# Altium PCB ReversePolarityPCB.PcbDoc
Units mil, origin at the board's own origin, x right, y up, seen from the top; angles counter-clockwise.
Board outline 3630 x 2625 mil, 2 copper layers (Top Layer, Bottom Layer); 20 components, 12 nets, 71 pads, 0 vias.
Unrouted connection lines stored in the file: 1.
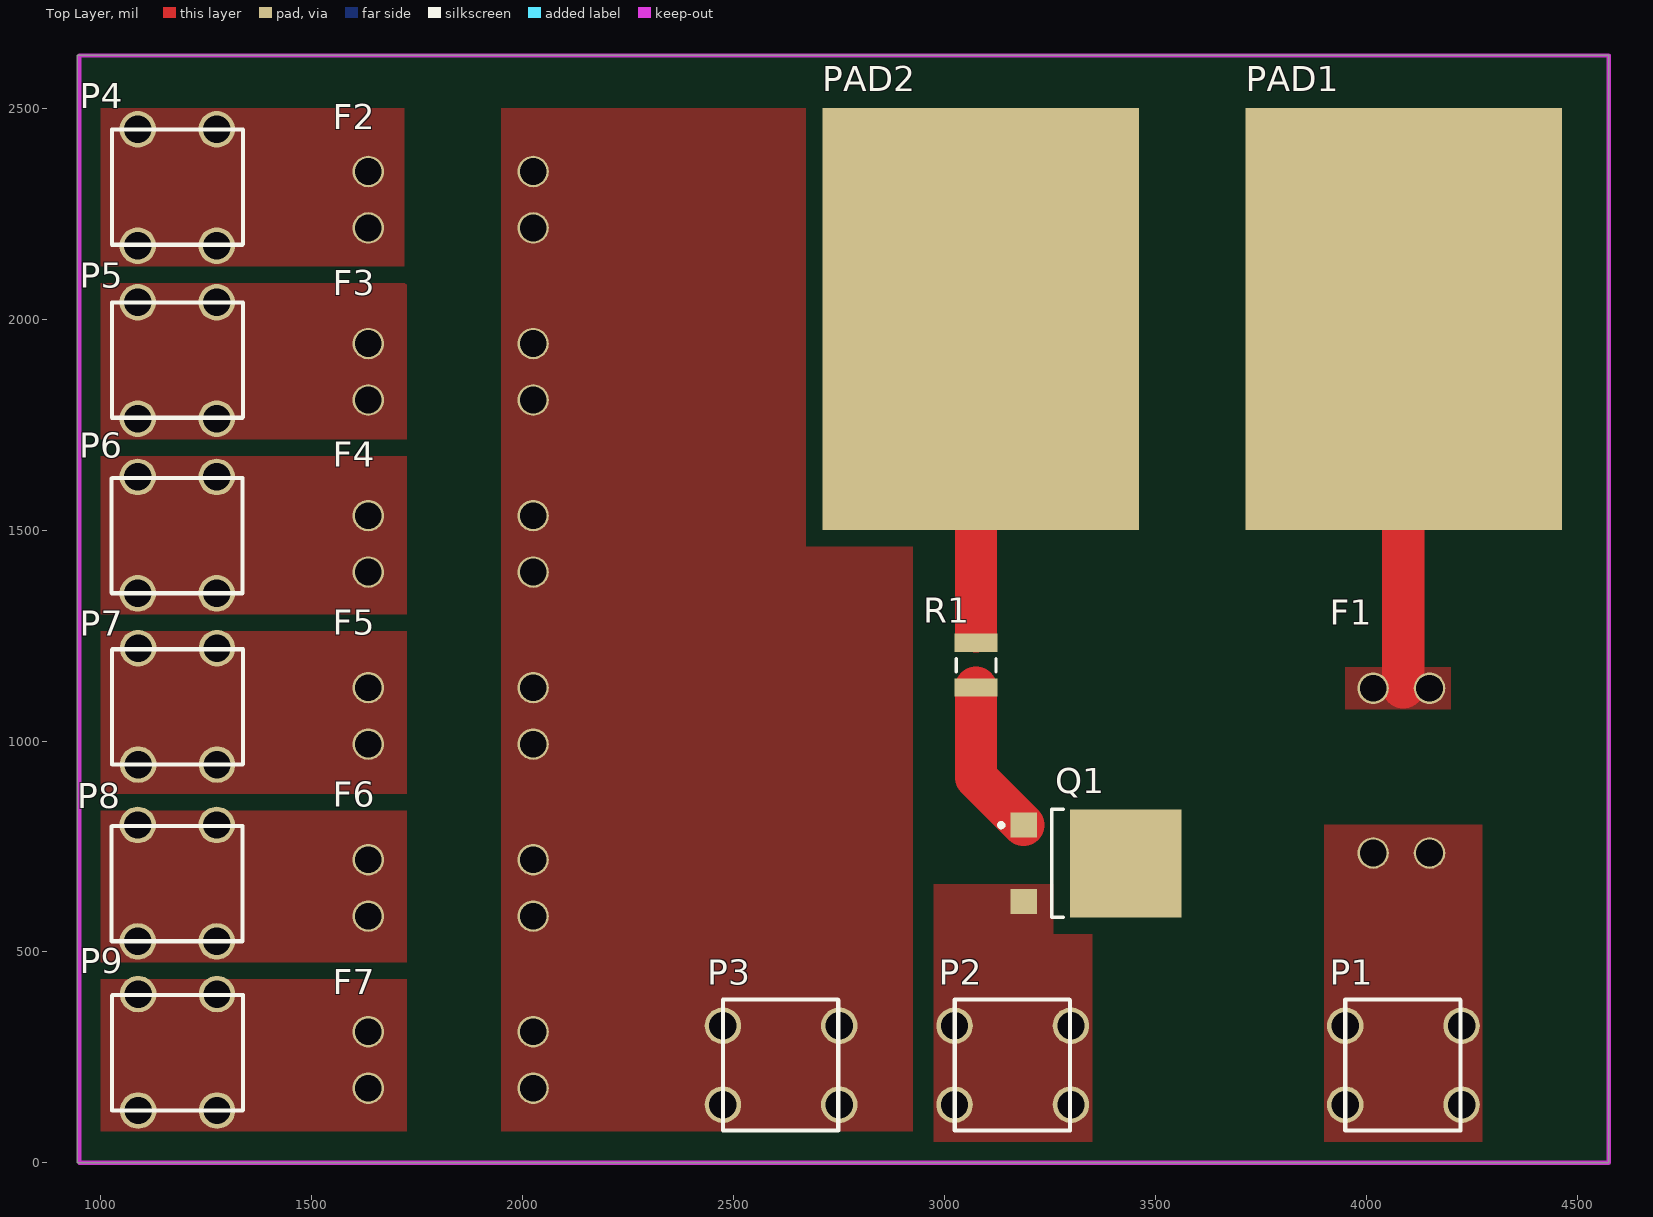
[diagram p0: Top Layer view]
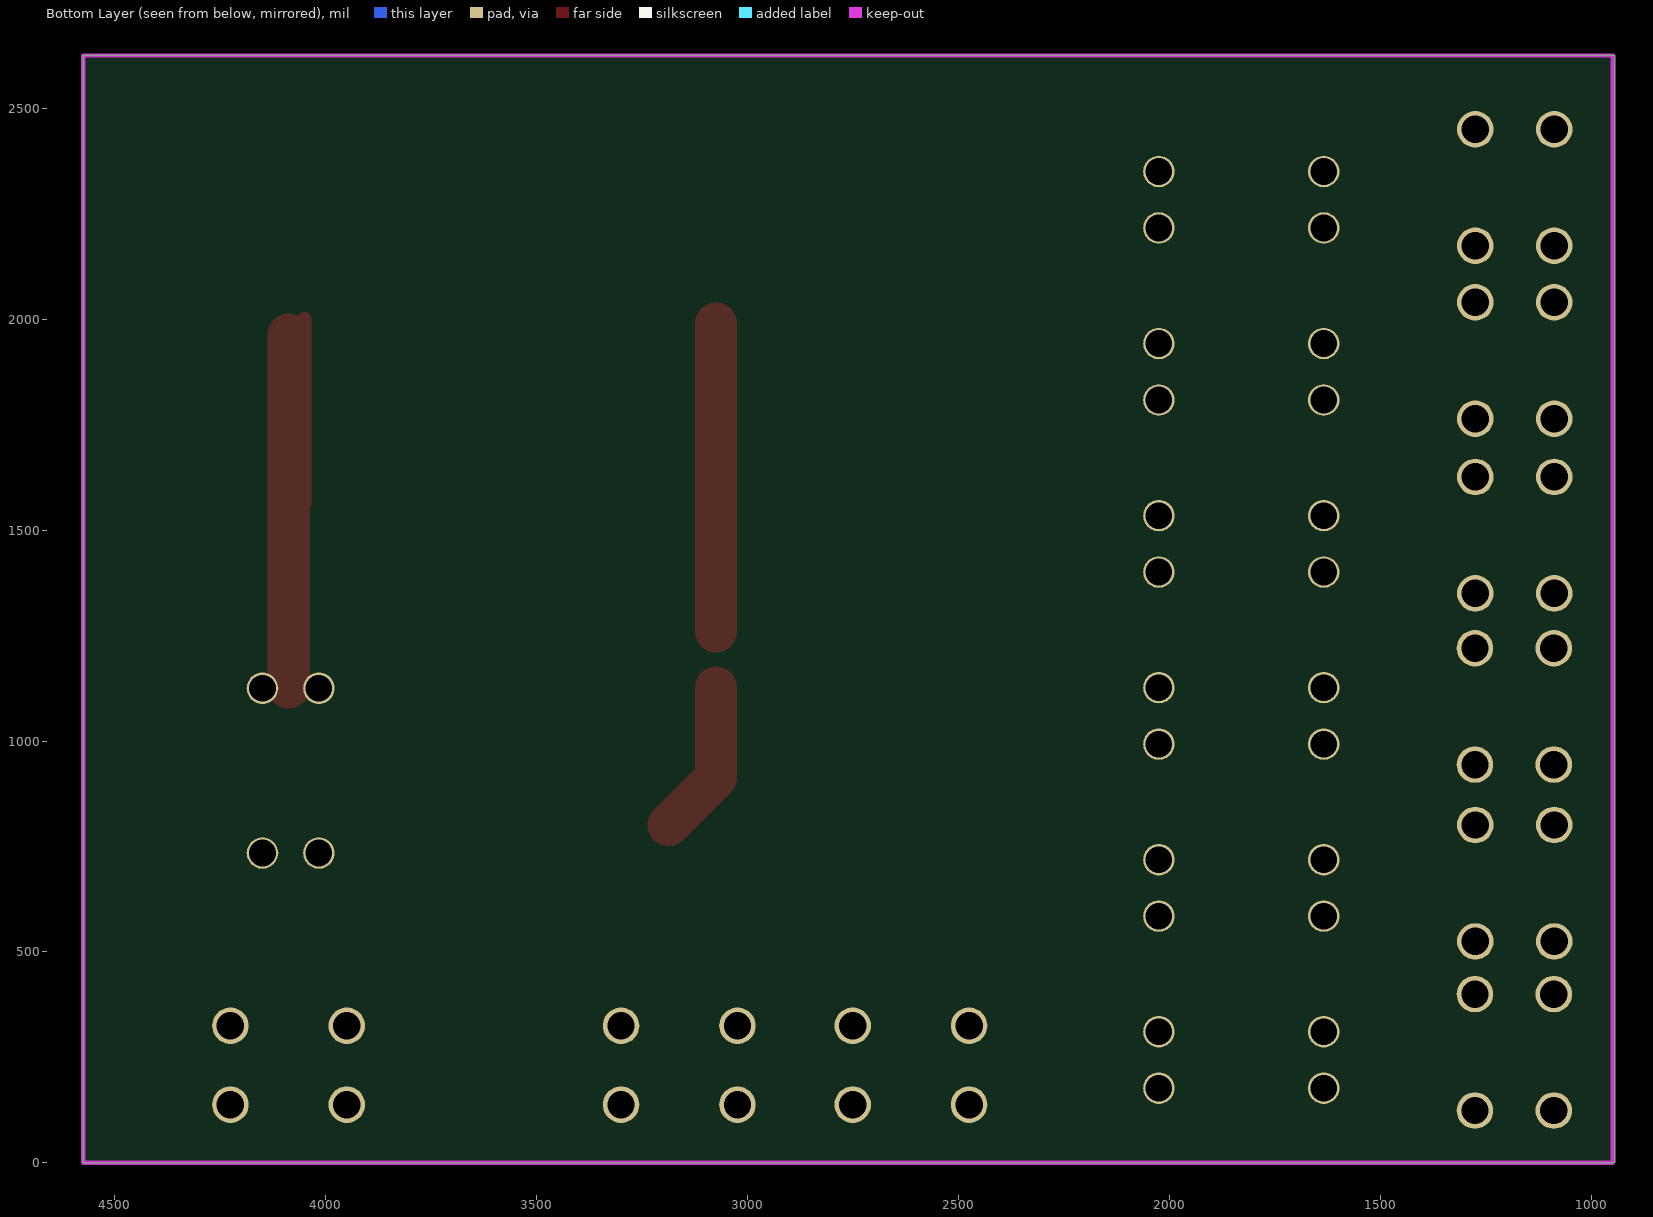
[diagram p1: Bottom Layer view, seen from below]
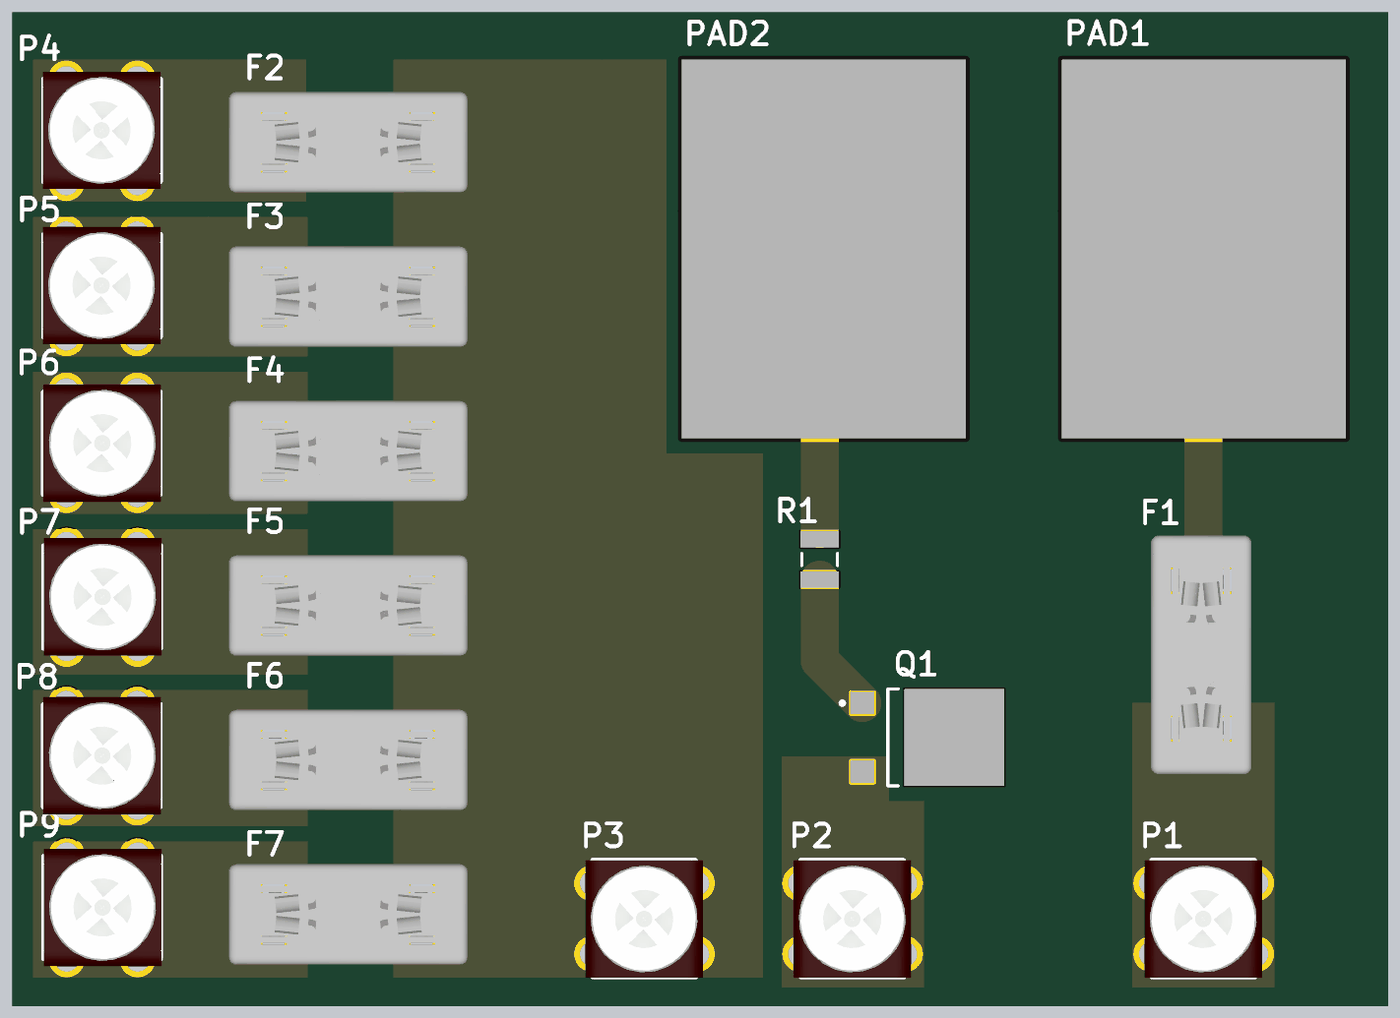
[diagram p2: 3D render of the assembled board from above, using the file's embedded part models]

## Layer stack, top to bottom
Top Solder: solder mask 0.4, Solder Resist, Dk 3.5
Top Layer: signal copper 1.4
Dielectric 1: dielectric 12.6, FR-4, Dk 4.8
Bottom Layer: signal copper 1.4
Bottom Solder: solder mask 0.4, Solder Resist, Dk 3.5

## Board outline
945,0 4575,0 4575,2625 945,2625

## Design rules (kind name [scope] priority, off if disabled: settings)
Clearance [All] p1: gap=10 ignorepadtopadclearanceinfootprint=FALSE except(0: Arc-Hole Track-Hole SMDPad-Hole THPad-Hole Via-Hole Fill-Hole Poly-Hole Region-Hole Text-Hole; 40: SMDPad-Poly Poly-Poly)
PolygonConnect [All] p1: connectstyle=Direct reliefconductorwidth=10 reliefentries=4 polygonreliefangle="90 Angle" airgapwidth=10
RoutingVias [All] p1: holewidth=28 width=50 viastyle="Through Hole" minholewidth=28 minwidth=50 maxholewidth=28 maxwidth=50
SolderMaskExpansion [All] p1: expansion=4
Width [All] p1: maxlimit=100 minlimit=10 preferedwidth=35 toplayer_minwidth=25 bottomlayer_maxwidth=10 bottomlayer_prefwidth=10 minimp=50.000000 maximp=50.000000 favimp=50.000000
30 further rules are at their usual default settings.

## Components (designator, comment, footprint, x,y, rotation, side; value= is the part's Value field where it differs from the comment)
F1 "Fuse 1" fuseholder 4016.14,734.45 r270 top
F2 "Fuse 1" fuseholder 2025,2216.14 r0 top
F3 "Fuse 1" fuseholder 2025,1808.35 r0 top
F4 "Fuse 1" fuseholder 2025,1400.55 r0 top
F5 "Fuse 1" fuseholder 2025,992.76 r0 top
F6 "Fuse 1" fuseholder 2025,584.96 r0 top
F7 "Fuse 1" fuseholder 2025,177.17 r0 top
P1 "EXPOSED SOLDER PAD" ScrewTerminalMount 4225.98,137.99 r90 top
P2 "EXPOSED SOLDER PAD" ScrewTerminalMount 3300,137.99 r90 top
P3 "EXPOSED SOLDER PAD" ScrewTerminalMount 2750.98,137.99 r90 top
P4 "EXPOSED SOLDER PAD" ScrewTerminalMount 1087.99,2174.02 r0 top
P5 "EXPOSED SOLDER PAD" ScrewTerminalMount 1087.99,1764.02 r0 top
P6 "EXPOSED SOLDER PAD" ScrewTerminalMount 1275,1625.98 r180 top
P7 "EXPOSED SOLDER PAD" ScrewTerminalMount 1275.79,1220 r180 top
P8 "EXPOSED SOLDER PAD" ScrewTerminalMount 1275,800.98 r180 top
P9 "EXPOSED SOLDER PAD" ScrewTerminalMount 1275.79,400 r180 top
PAD1 "EXPOSED SOLDER PAD" "PAD - duplicate" 4087.5,2000 r90 top
PAD2 "EXPOSED SOLDER PAD" "PAD - duplicate" 3085.02,2000 r90 top
Q1 "ATP102-TL-H" ONSC-ATPAK-3-369AM_V 3430,710 r0 top
R1 "Res3" 14-1210 3075,1179.76 r270 top value=1K

## Footprints (in the part's own frame and the unit in brackets; to place one, negate y for a bottom-side part, rotate by r counter-clockwise, add the part's x,y. Pads: shape width x height; smd on the part's side, far side on the other; paste and mask are expansions set on the pad)
14-1210 [mm] "Chip Resistor, Body 3.2x2.5mm, IPC High Density"
  rect 1.1x2.6 smd: 1(-1.35,0) 2(1.35,0)
  silkscreen extent -0.4,-1.2 0.4,1.2, body extent -1.68,-1.32 1.68,1.32, height 0.9
fuseholder [mm]
  round 1.9 hole 1.6: 1(-9.92,0) 1(-9.92,3.4) 2(0,3.4) 2(0,0)
  body extent -12.92,-1.7 3.08,5.03, height 7.36
ONSC-ATPAK-3-369AM_V [mm] "DPAK, 3-Leads, Body 7.3x6.5mm, Pitch 2.3mm"
  rect 1.6x1.5 smd: 1(-6.15,2.3) 3(-6.15,-2.3)
  rect 6.7x6.5 smd: 4(0,0)
  silkscreen extent -7.62,-3.25 -3.75,3.25, body extent -4.45,-3.25 2.85,3.25, height 1.77
"PAD - duplicate" [mil]
  rect 1000x750 smd mask+10: 1(0,-1)
ScrewTerminalMount [mm]
  round 2.2 hole 1.65: 1(0,7.01) 1(0,0) 1(4.75,7.01) 1(4.75,0)
  silkscreen extent -1.56,0.06 6.33,7, body extent -1.59,-0.4 6.29,7.47, height 16.33

## Part data
F1 F2 F3 F4 F5 F6 F7: "Fuse", LatestRevisionDate=17-Jul-2002, LatestRevisionNote="Re-released for DXP Platform.", PackageDescription="Thru-Hole; 2 Leads", PackageReference=PIN-W2/E2.8, Published=8-Jun-2000, Publisher="Altium Limited"
P1 P2 P3 P4 P5 P6 P7 P8 P9 PAD1 PAD2: "testing point"
Q1: "P-Channel Power MOSFET, -30 V, -40 A, 18.5 mOhm, Single, 3-Pin ATPAK, Pb-Free, Tape and Reel", Manufacturer="On Semiconductor", Package Type="DPAK (Single Gauge) / ATPAK", Channel Polarity="P Channel", Ciss Typ (pF)=1490, ComponentLink1Description="Manufacturer URL", ComponentLink1URL=http://www.onsemi.com/, ComponentLink2Description=Datasheet, ComponentLink2URL=http://www.onsemi.com/pub_link/Collateral/ATP102-D.PDF, ComponentLink3Description="Package Specification", ComponentLink3URL=http://www.onsemi.com/pub_link/Collateral/369AM.PDF, Configuration=Single, Coss Typ (pF)=360, Crss Typ (pF)=270, ID Max (A)=40, Mounting Technology="Surface Mount", PackageDescription="3-Pin Flange Mount, Body 6.5 x 7.3 mm, Pitch 2.3 mm", PackageReference=ATPAK-3-369AM, PackageVersion="Rev. O, 02/2012", Packing="Tape and Reel", PartNumber=ATP102-TL-H, PD Max (W)=40, RoHS=Pb-Free, V(BR)DSS Min (V)=30, VGS(th) Max (V)=2.6, VGS Max (V)=20
R1: "Resistor", LatestRevisionDate=29-May-2009, LatestRevisionNote="IPC-7351 Footprint Added.", PackageDescription="Chip Resistor", PackageReference=J1-0603, Published=8-Jun-2000, Publisher="Altium Limited"

## Nets (pads, with @x,y where several pads share a name; then routed paths per layer and width w, separated by ;. In a path a pad name is that pad's centre, name@x,y a point inside that pad or via, vN(x,y) a via of type N, cw(c..) or ccw(c..) an arc to the next point about the centre after c; other vN are vias at no path point)
12V: F1.1 PAD1.1 Q1.4 | length 1325
  Top Layer w35: PAD1.1@4051,1563.5 4051,2000 PAD1.1@4087.5,1963.5
  Top Layer w100: 4087.5,1126.61 PAD1.1@4087.5,1963.5
DCDC-In: F1.2 P1.1
FuseOut1: F2.1 P4.1
FuseOut2: F3.1 P5.1
FuseOut3: F4.1 P6.1
FuseOut4: F5.1 P7.1
FuseOut5: F6.1 P8.1
FuseOut6: F7.1 P9.1
GND: PAD2.1 R1.1 | length 744.6
  Top Layer w35: PAD2.1@3075,1988.98 PAD2.1
  Top Layer w100: 3075,1260 PAD2.1@3075,1988.98
R1_Net: Q1.1 R1.2 | length 372.8
  Top Layer w100: R1.2 3075,913.43 Q1.1
SwitchIn: F2.2 F3.2 F4.2 F5.2 F6.2 F7.2 P3.1
SwitchOut: P2.1 Q1.3

## Polygon pours and split planes (outlines as drawn)
12V on Top Layer "12VPour" (solid, pour order 62): 3950,1175 4200,1175 4200,1075 3950,1075
SwitchIn on Top Layer "Top Layer-SwitchIn" (solid, pour order 66): 1950,2500 1950,75 2925,75 2925,2500
FuseOut1 on Top Layer "FuseOut1Pour" (solid, pour order 6): 1000,2500 1720.17,2500 1720.17,2125 1000,2125
DCDC-In on Top Layer "HighVoltagePour" (solid, pour order 26): 3900,800.98 3900,50 4275,50 4275,800.98
SwitchOut on Top Layer "SwitchOutPour" (solid, pour order 24): 2975,660 2975,50 3350,50 3350,660
FuseOut6 on Top Layer "FuseOut6Pour" (solid, pour order 20): 1000,450 1725,450 1725,75 1000,75
FuseOut5 on Top Layer "FuseOut5Pour" (solid, pour order 18): 1000,850 1725,850 1725,475 1000,475
FuseOut4 on Top Layer "FuseOut4Pour" (solid, pour order 16): 1000,1275 1725,1275 1725,875 1000,875
FuseOut2 on Top Layer "FuseOut2Pour" (solid, pour order 14): 1000,2100 1725,2100 1725,1700 1000,1700
FuseOut3 on Top Layer "FuseOut3Pour" (solid, pour order 12): 1000,1675 1725,1675 1725,1300 1000,1300

## Keep-outs
Keep-Out Layer:
  lines w10: 2133.75,2625 1758.75,2625 950,2625 950,0 4575,0 4575,1365 4575,1400 4575,2625 4200,2625 4075,2625 3964.69,2625 3621.56,2625 3589.69,2625 3011.25,2625 2133.75,2625 ; 2133.75,2625 2133.75,2625

## Dimensions
4575,2625 to 4575,0 on Mechanical 1
945,2625 to 4575,2625 on Mechanical 1